# Altium PCB Pet_Tracker_MB_Test.PcbDoc (part 2 of 2)
Units mil, origin at the board's own origin, x right, y up, seen from the top; angles counter-clockwise.
Board outline 1653.54 x 1771.65 mil, 4 copper layers (Top Layer, Mid Layer 1, Mid Layer 2, Bottom Layer), stack 23.756 mil thick; 49 components, 52 nets, 242 pads, 474 vias.
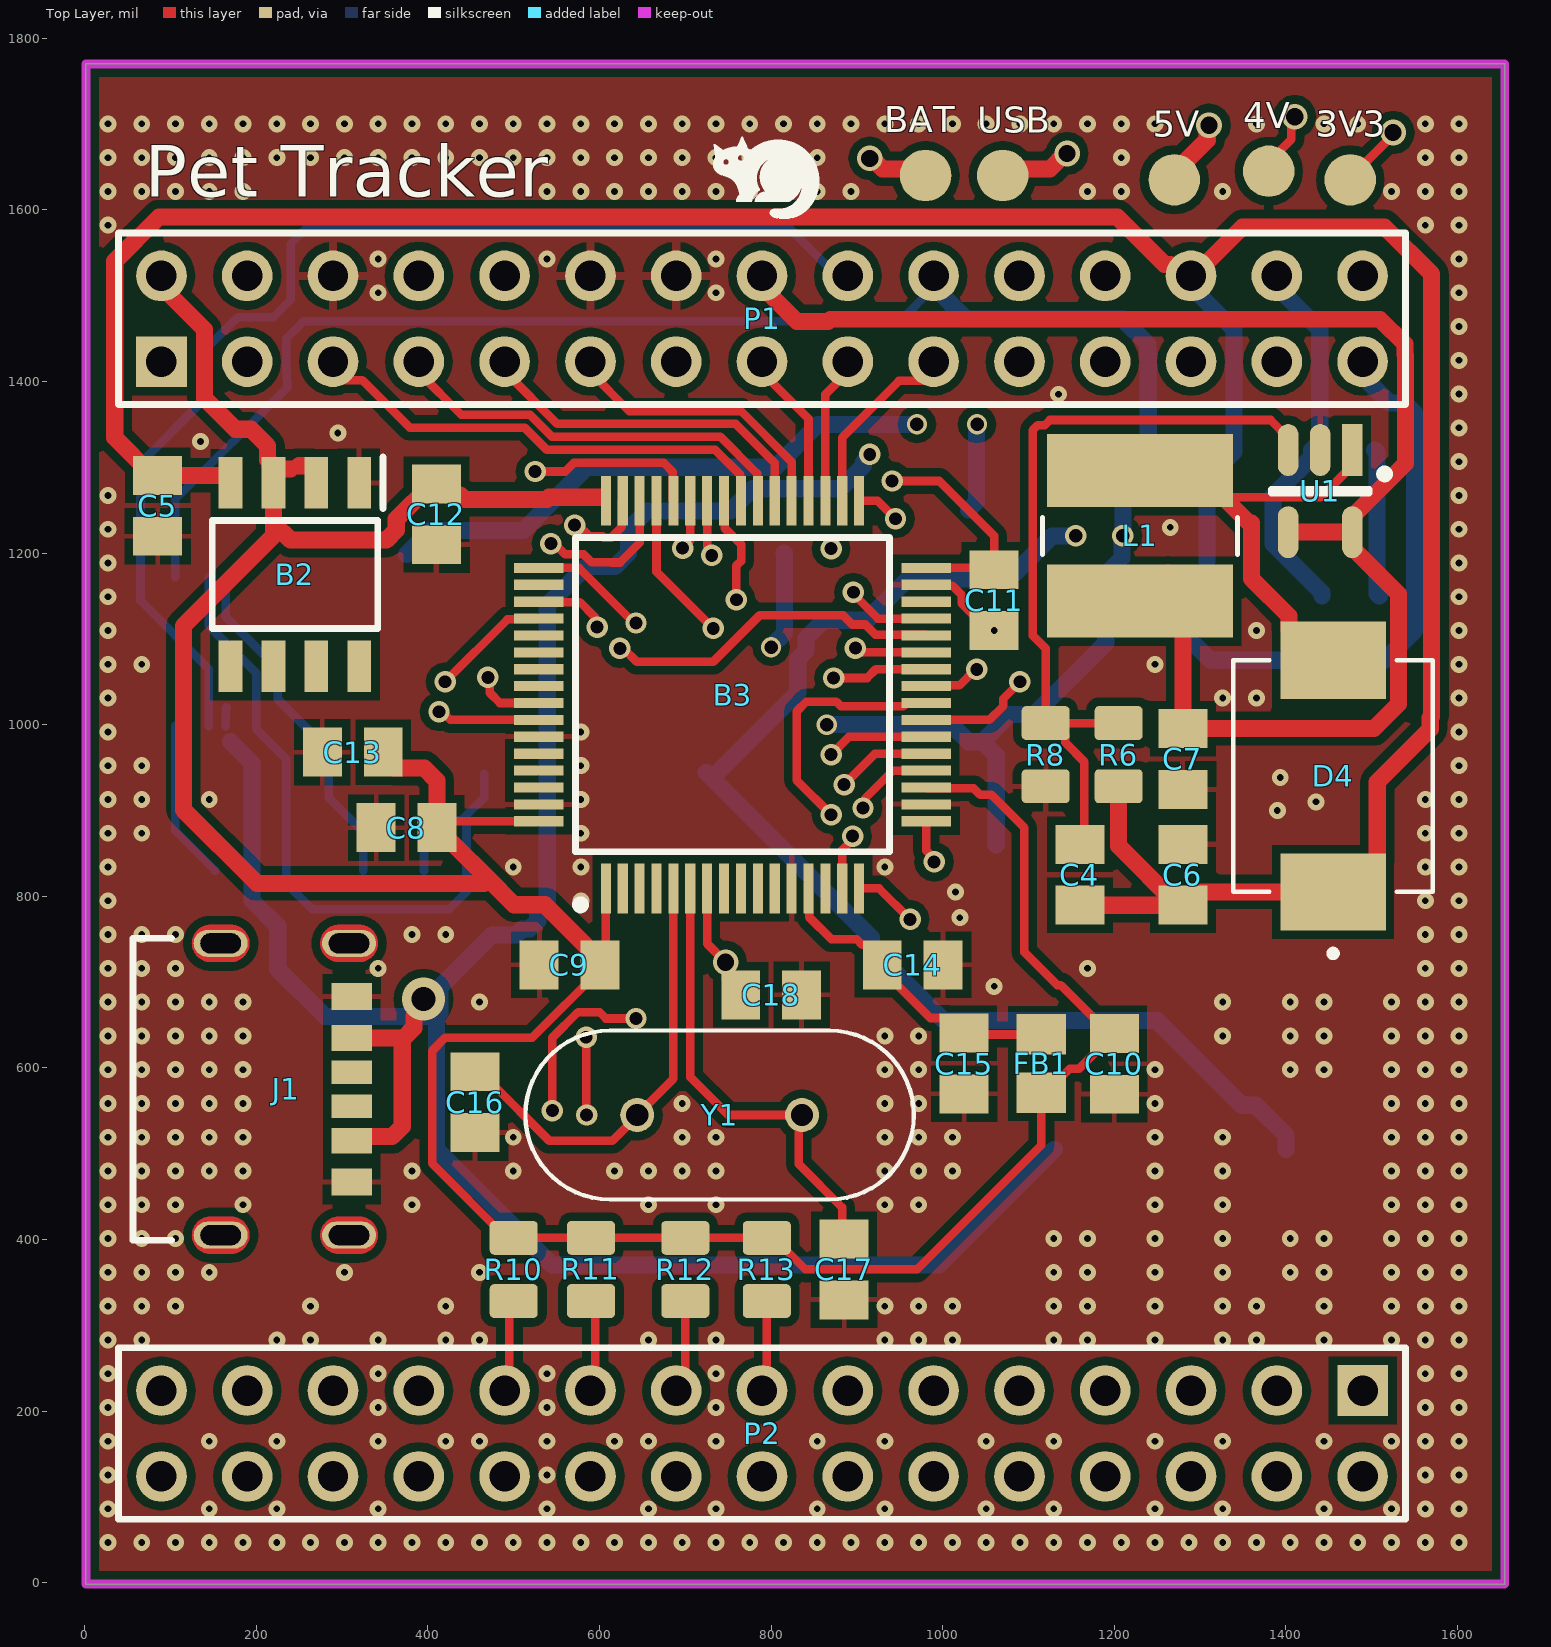
[diagram p0: Top Layer view]

## Via types
v1: diameter 19.68, hole 7.87, Top Layer to Bottom Layer, tented both sides, 424 vias
v2: diameter 25, hole 15, Top Layer to Bottom Layer, tented both sides, 33 vias
v3: diameter 30, hole 20, Top Layer to Bottom Layer, tented both sides, 6 vias
v4: diameter 23.62, hole 15.75, Top Layer to Bottom Layer, tented both sides, 4 vias
v5: diameter 19.68, hole 7.87, Top Layer to Bottom Layer, tented top, 3 vias
v6: diameter 25, hole 15.75, Top Layer to Bottom Layer, tented top, 2 vias
v7: diameter 19.68, hole 7.87, Top Layer to Bottom Layer, tented bottom, 1 vias
v8: diameter 50, hole 28, Top Layer to Bottom Layer, tented both sides, 1 vias

## Nets (pads, with @x,y where several pads share a name; then routed paths per layer and width w, separated by ;. In a path a pad name is that pad's centre, name@x,y a point inside that pad or via, vN(x,y) a via of type N, cw(c..) or ccw(c..) an arc to the next point about the centre after c; other vN are vias at no path point) (continued)
V_Bat: (continued)
  Bottom Layer w20: v4(799.94,1090.06) 799.94,1091.04 815.55,1106.65 815.55,1199.45 Mano_test.3 ; v4(864.92,1000) 1010,1000 D2.C D2.C@1046.34,980 ; P1.20@990,1510 1027.44,1472.56 1209.92,1472.56 1238.94,1443.55 1238.94,1431.11 1239.53,1430.51 1239.53,1301.85 1210,1272.32 v6(1210,1220) 1209.04,1219.04 1209.04,1194.04 1190,1175 1190,1095 1106.96,1011.96 1078.3,1011.96 D2.C@1046.34,980 ; C3.2 1062.36,963.98 D2.C@1046.34,980
pads on no net: B1.3 B2.5 B2.6 B2.7 B2.8 B3.2 B3.3 B3.4 B3.8 B3.9 B3.10 B3.11 B3.14 B3.30 B3.50 B3.53 B3.54 B3.55 B3.56 B3.60 B3.61 B3.62 J1.A5 J1.B5 P2.2 P2.4 P2.6 P2.8 P2.10 P2.12 P2.14 P2.16 P2.18 P2.20 P2.22 P2.24 P2.26 P2.28 P2.30

## Polygon pours and split planes (outlines as drawn)
GND on Top Layer "GND_TOP_LAYER" (solid, remove dead copper, pour order 0): 1.46,-1.65 1.46,1770 1655,1770 1655,-1.65
GND on Mid Layer 1 "GND_MIDDLE_1" (solid, remove dead copper, pour order 1): 1.46,-1.65 1.46,1770 1655,1770 1655,-1.65
GND on Mid Layer 2 "GND_MIDDLE_2" (solid, remove dead copper, pour order 2): 1.46,-1.65 1.46,1770 1655,1770 1655,-1.65
GND on Bottom Layer "GND_BOTTOM_LAYER" (solid, remove dead copper, pour order 3): 1.46,-1.65 1.46,1770 1655,1770 1655,-1.65

## Keep-outs
Keep-Out Layer:
  the board outline again, w10

## Silkscreen, mask and mechanical layers (free items; w line width, h text height)
Top Overlay:
  region: 2258 vertices and 2 holes, not listed, extent 732.48,1589.33 856.06,1685.16
  text "Pet Tracker" at 70,1615 h60

## Dimensions
1.46,-1.65 to 1.46,1770 on Mechanical 1
1.46,1770 to 1655,1770 on Mechanical 1

## Text inside footprints (layer, text, board x,y; h text height)
L1: Mechanical 13 "*" at 1180,1336.5 h50 r270